# Altium PCB Eurocard VME 3U (3.937 x 8.660 inches).PCBDOC (part 1 of 2)
Units mm, origin at the board's own origin, x right, y up, seen from the top; angles counter-clockwise.
Board outline 219.96 x 100 mm, 2 copper layers (Component Side, Bottom Layer), stack 0.325 mm thick; 72 components, 87 nets, 462 pads, 228 vias.
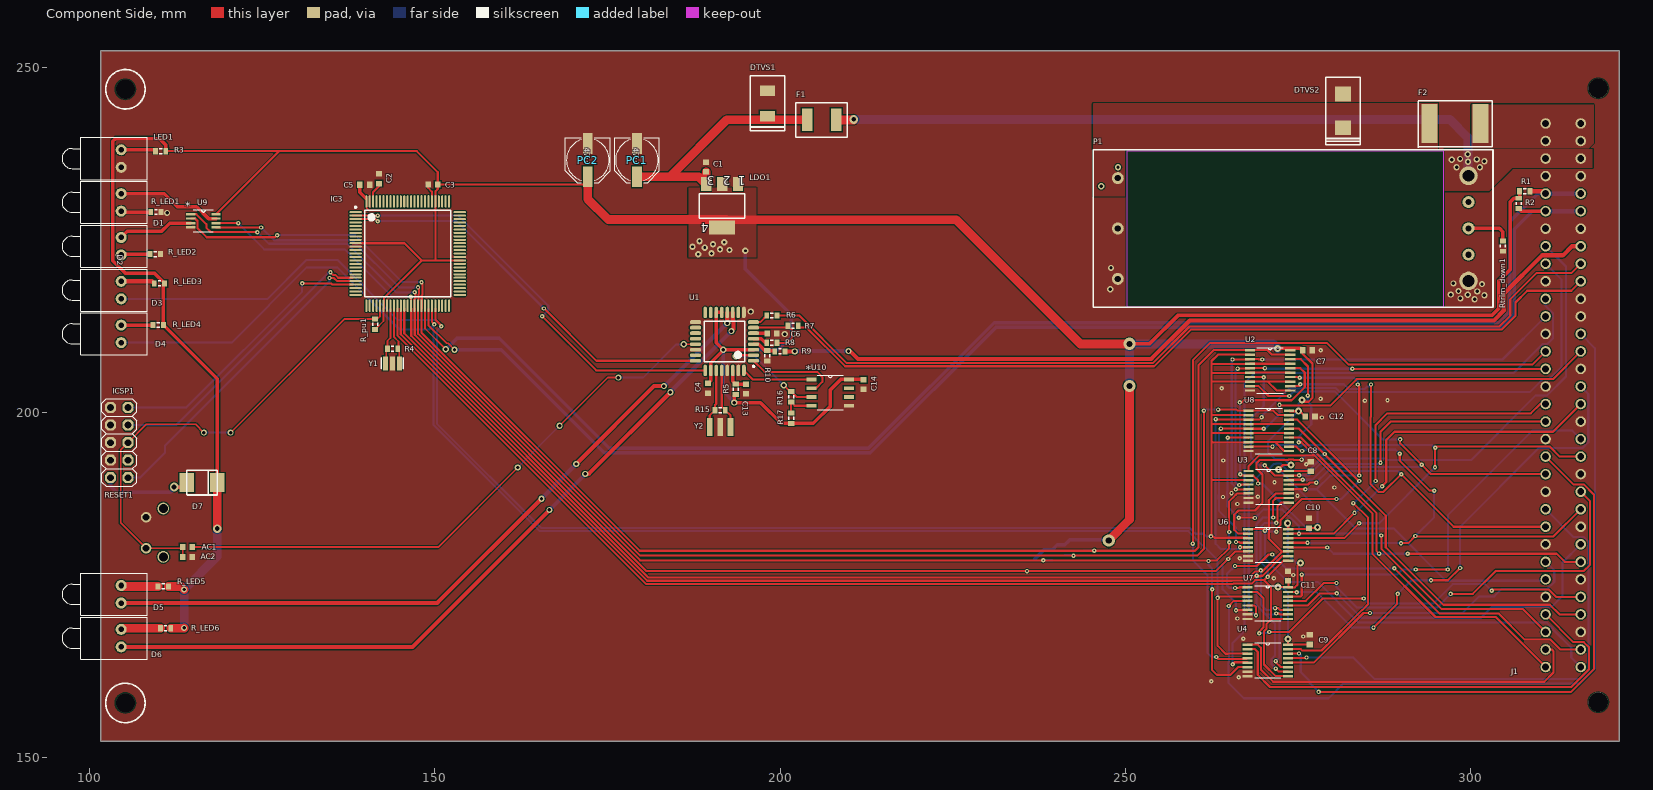
[diagram p0: Component Side view]
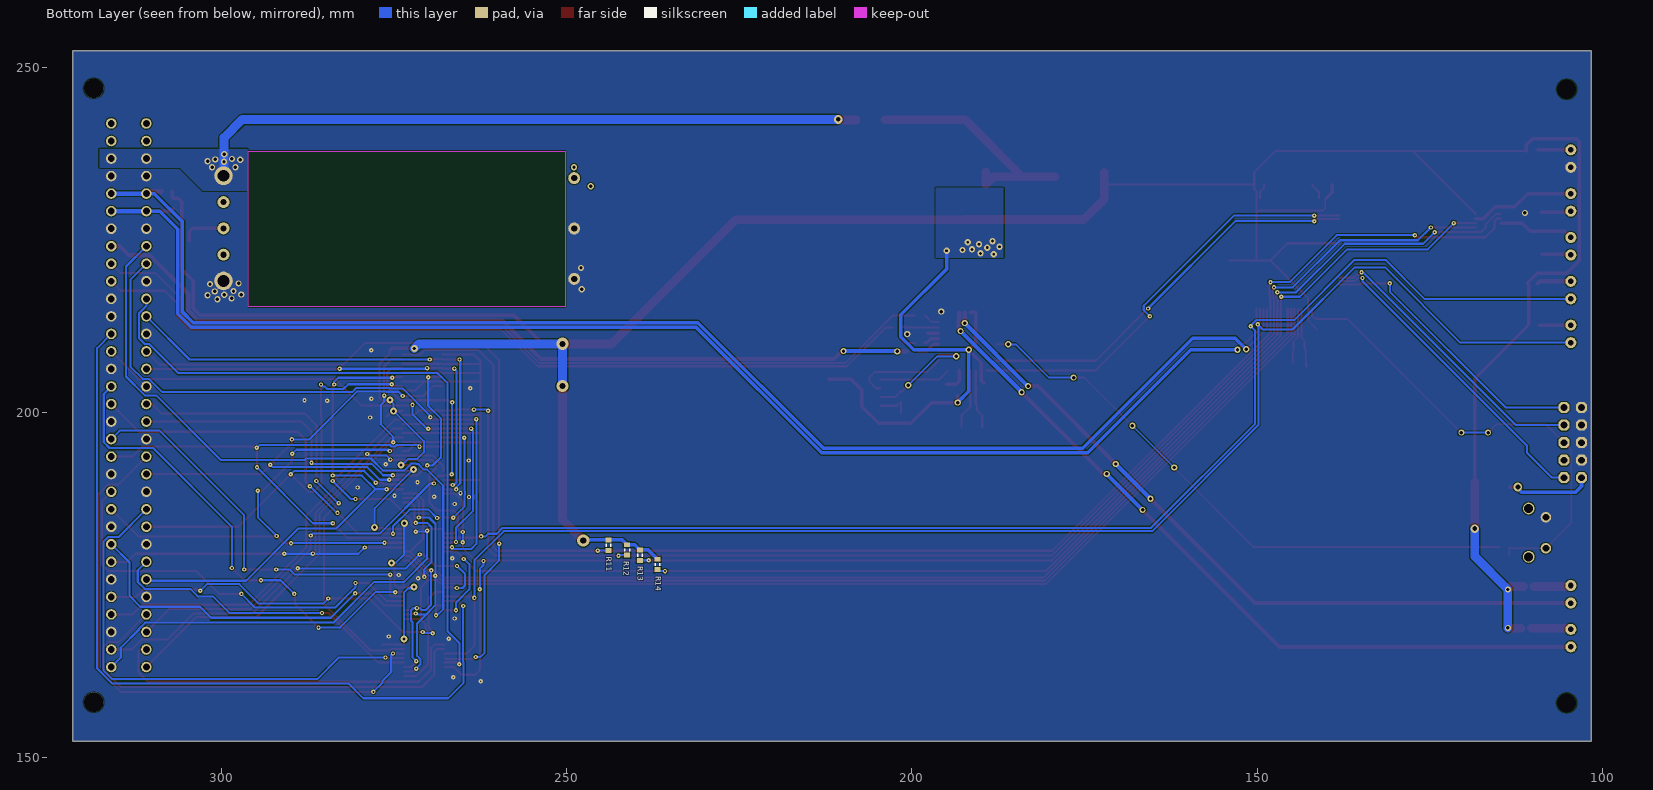
[diagram p1: Bottom Layer view, seen from below]

## Layer stack, top to bottom
Top Solder: solder mask 0.0102, Solder Resist, Dk 3.5
Component Side: signal copper 0.0356
Dielectric 1: core 0.254, FR-4, Dk 4.2
Bottom Layer: signal copper 0.0356
Solder Side: solder mask 0.0102, Solder Resist, Dk 3.5

## Board outline
101.6,152.4 321.564,152.4 321.564,252.4 101.6,252.4

## Design rules (kind name [scope] priority, off if disabled: settings)
Clearance [All] p1: gap=0.15 ignorepadtopadclearanceinfootprint=FALSE except(0: Arc-Hole Track-Hole SMDPad-Hole THPad-Hole Via-Hole Fill-Hole Poly-Hole Region-Hole Text-Hole)
FabricationTestPointUsage TestPointUsage [All] p1: valid=0 allowmultiple=FALSE
FabricationTestpoint Testpoint [All] p1: side=3 testpointundercomponent=TRUE minsize=1.016 maxsize=2.54 preferedsize=1.524 minholesize=0.508 maxholesize=1.016 preferedholesize=0.813 testpointgrid=0.025 allowsidetop=TRUE allowsidebottom=TRUE usegrid=TRUE gridtolerance=0
PlaneClearance [All] p1: clearance=0.254
PlaneConnect [All] p1: planeconnectstyle=Direct reliefexpansion=0.508 reliefentries=4 reliefconductorwidth=0.254 reliefairgap=0.254
PolygonConnect [All] p1: connectstyle=Direct reliefconductorwidth=0.254 reliefentries=4 polygonreliefangle="90 Angle" airgapwidth=0.254
RoutingVias [All] p1: holewidth=0.711 width=1.27 viastyle="Through Hole" minholewidth=0.711 minwidth=1.27 maxholewidth=0.711 maxwidth=1.27
SilkToSolderMaskClearance SilkscreenOverComponentPads [IsPad] p1: minsilkscreentomaskgap=0.254 clearancetoexposedcopper=TRUE
SolderMaskExpansion [All] p1: expansion=0.051
Width [All] p1: maxlimit=1.3 minlimit=0.1 preferedwidth=0.254
25 further rules are at their usual default settings.

## Components (designator, comment, footprint, x,y, rotation, side; value= is the part's Value field where it differs from the comment)
AC1 "Cap Semi" 1608[0603] 114.148,180.492 r0 top
AC2 "Cap Semi" 1608[0603] 114.148,179.07 r0 top
C1 "Cap Semi" 1608[0603] 189.281,235.56 r270 top
C2 "Cap Semi" 1608[0603] 141.884,233.858 r270 top
C3 "Cap Semi" 1608[0603] 149.708,233.02 r0 top
C4 "Cap Semi" 1608[0603] 189.56,203.505 r90 top
C5 "Cap Semi" 1608[0603] 139.827,232.969 r180 top
C6 "Cap Semi" 1608[0603] 198.806,211.43 r0 top
C7 "" 1608[0603] 276.377,209.017 r0 top
C8 "" 1608[0603] 276.86,192.176 r90 top
C9 "" 1608[0603] 276.708,167.081 r90 top
C10 "" 1608[0603] 276.606,183.947 r90 top
C11 "" 1608[0603] 273.583,176.301 r90 top
C12 "" 1608[0603] 276.784,199.415 r0 top
C13 "Cap Semi" 1608[0603] 195.047,203.378 r270 top
C14 "Cap Semi" 1608[0603] 212.09,204.038 r270 top
D1 "LEDYELLOW" LEDYELLOW 104.546,230.429 r180 top
D2 "LEDYELLOW" LEDYELLOW 104.546,224.079 r180 top
D3 "LEDYELLOW" LEDYELLOW 104.546,217.729 r180 top
D4 "LEDYELLOW" LEDYELLOW 104.546,211.379 r180 top
D5 "LEDYELLOW" LEDYELLOW 104.546,173.66 r180 top
D6 "LEDYELLOW" LEDYELLOW 104.546,167.31 r180 top
D7 "MBRS130LT3G" SMB-403A 116.256,189.84 r180 top
DTVS1 "SMBJ10CA" DO-214AA 198.171,244.78 r90 top
DTVS2 "SMBJ48A" SMBJ 281.534,243.688 r90 top
F1 "MINISMDC050F-2" MF-MSMF1 206.019,242.392 r180 top
F2 "" MC33192 297.764,241.859 r0 top
IC3 "ATMEGA2560-16AU" 100A_N 146.05,223.012 r0 top
ICSP1 "5x2 M" 2X05 104.267,195.631 r90 top
J1 "DIN41612_64WAY" "09 03 164 6919" 313.436,202.489 r270 top
LDO1 "LDO_5V" SOT223 191.592,229.921 r180 top
LED1 "LEDRED" LEDRED 104.546,236.779 r180 top
P1 "DCDCPowerModule" EHHD006A0B41-HZ 274.32,226.644 r0 top
PC1 "47u" PANASONIC_D 179.262,236.556 r270 top
PC2 "47u" PANASONIC_D 172.15,236.556 r270 top
R1 "" J1-0603 307.873,232.054 r0 top
R2 "" J1-0603 306.984,230.276 r270 top
R3 "" J1-0603 110.261,237.846 r180 top
R4 "" J1-0603 143.866,209.22 r180 top
R5 "" J1-0603 193.573,203.352 r270 top
R6 "" J1-0603 198.806,214.046 r0 top
R7 "" J1-0603 201.879,212.547 r0 top
R8 "" J1-0603 198.806,210.083 r0 top
R9 "" J1-0603 199.974,208.839 r180 top
R10 "" J1-0603 198.12,208.204 r270 top
R11 "" J1-0603 243.942,180.772 r270 bottom
R12 "" J1-0603 241.249,180.086 r270 bottom
R13 "" J1-0603 239.395,179.324 r270 bottom
R14 "" J1-0603 236.855,177.978 r270 bottom
R15 "" J1-0603 191.313,200.33 r180 top
R16 "" J1-0603 201.625,202.26 r90 top
R17 "" J1-0603 201.6,199.161 r90 top
R_LED1 "Res3" J1-0603 109.576,229.032 r0 top
R_LED2 "Res3" J1-0603 109.474,222.936 r0 top
R_LED3 "Res3" J1-0603 110.084,218.694 r0 top
R_LED4 "Res3" J1-0603 109.906,212.674 r0 top
R_LED5 "Res3" J1-0603 110.642,174.803 r0 top
R_LED6 "Res3" J1-0603 110.973,168.732 r0 top
R_pu1 "pullup" J1-0603 141.326,212.776 r270 top
RESET1 "PB_RST" 1-1825027-4 109.398,182.575 r270 top
Rtrim_down1 "" J1-0603 304.698,224.104 r90 top
U1 "FT232BL" LQFP-32_N 191.948,210.287 r180 top
U2 "OCTAL BUFFER/DRIVER" SOP65P640X120-20N 270.967,206.096 r0 top
U3 "single 8-Channel multiplexer" SOP65P640X120-16N 270.764,189.23 r0 top
U4 "single 8-Channel multiplexer" SOP65P640X120-16N 270.637,164.084 r0 top
U6 "single 8-Channel multiplexer" SOP65P640X120-16N 270.688,180.823 r0 top
U7 "single 8-Channel multiplexer" SOP65P640X120-16N 270.637,172.364 r0 top
U8 "OCTAL BUFFER/DRIVER" SOP65P640X120-20N 270.789,197.333 r0 top
U9 "SN74LVC2G00DCTR" SOP8 116.459,227.762 r0 top
U10 "1K Microwire Compatible Serial EEPROM" SOIC127P600X175-8N 207.264,202.87 r0 top
Y1 "CSTCE16M0V53-R0 16MHZ" RESONATOR 143.821,207.098 r0 top
Y2 "" CSTCR6M00G53-R0 191.313,197.891 r0 top

## Footprints (in the part's own frame and the unit in brackets; to place one, negate y for a bottom-side part, rotate by r counter-clockwise, add the part's x,y. Pads: shape width x height; smd on the part's side, far side on the other; paste and mask are expansions set on the pad)
1-1825027-4 [mm]
  round 1.7 hole 1.3: 0(-3.505,1.245) 0(3.505,1.245)
  round 1.524 hole 0.99: 1(-2.25,-1.245) 2(2.25,-1.245)
  body extent -4.2,-7.37 4.2,2.78, height 7
2X05 [mil]
  oct 62x62 hole 38: 1(-200,-50) 2(-200,50) 3(-100,-50) 4(-100,50) 5(0,-50) 6(0,50) 7(100,-50) 8(100,50) 9(200,-50) 10(200,50)
  silkscreen extent -250,-100 250,100
"09 03 164 6919" [mil]
  round 110.24 hole 110.24: 0(-1750,200) 0(1750,200)
  round 60 hole 39.37: 0(-1550,100) 1(-1450,100) 2(-1350,100) 3(-1250,100) 4(-1150,100) 5(-1050,100) 6(-950,100) 7(-850,100) 8(-750,100) 9(-650,100) 10(-550,100) 11(-450,100) 12(-350,100) 13(-250,100) 14(-150,100) 15(-50,100) 16(50,100) 17(150,100) 18(250,100) 19(350,100) 20(450,100) 21(550,100) 22(650,100) 23(750,100) 24(850,100) 25(950,100) 26(1050,100) 27(1150,100) 28(1250,100) 29(1350,100) 30(1450,100) 31(1550,100) 32(-1550,-100) 33(-1450,-100) 34(-1350,-100) 35(-1250,-100) 36(-1150,-100) 37(-1050,-100) 38(-950,-100) 39(-850,-100) 40(-750,-100) 41(-650,-100) 42(-550,-100) 43(-450,-100) 44(-350,-100) 45(-250,-100) 46(-150,-100) 47(-50,-100) 48(50,-100) 49(150,-100) 50(250,-100) 51(350,-100) 52(450,-100) 53(550,-100) 54(650,-100) 55(750,-100) 56(850,-100) 57(950,-100) 58(1050,-100) 59(1150,-100) 60(1250,-100) 61(1350,-100) 62(1450,-100) 63(1550,-100)
  body extent -1850,-100 1851,609, height 368
100A_N [mm] "Thin QFP, 100-Leads, Body 14x14mm, Pitch 0.5mm, IPC Medium Density"
  oval 1.8x0.291 smd mask+0.08: 1(-7.55,6) 2(-7.55,5.5) 3(-7.55,5) 4(-7.55,4.5) 5(-7.55,4) 6(-7.55,3.5) 7(-7.55,3) 8(-7.55,2.5) 9(-7.55,2) 10(-7.55,1.5) 11(-7.55,1) 12(-7.55,0.5) 13(-7.55,0) 14(-7.55,-0.5) 15(-7.55,-1) 16(-7.55,-1.5) 17(-7.55,-2) 18(-7.55,-2.5) 19(-7.55,-3) 20(-7.55,-3.5) 21(-7.55,-4) 22(-7.55,-4.5) 23(-7.55,-5) 24(-7.55,-5.5) 25(-7.55,-6) 51(7.55,-6) 52(7.55,-5.5) 53(7.55,-5) 54(7.55,-4.5) 55(7.55,-4) 56(7.55,-3.5) 57(7.55,-3) 58(7.55,-2.5) 59(7.55,-2) 60(7.55,-1.5) 61(7.55,-1) 62(7.55,-0.5) 63(7.55,0) 64(7.55,0.5) 65(7.55,1) 66(7.55,1.5) 67(7.55,2) 68(7.55,2.5) 69(7.55,3) 70(7.55,3.5) 71(7.55,4) 72(7.55,4.5) 73(7.55,5) 74(7.55,5.5) 75(7.55,6)
  oval 0.291x1.8 smd mask+0.08: 26(-6,-7.55) 27(-5.5,-7.55) 28(-5,-7.55) 29(-4.5,-7.55) 30(-4,-7.55) 31(-3.5,-7.55) 32(-3,-7.55) 33(-2.5,-7.55) 34(-2,-7.55) 35(-1.5,-7.55) 36(-1,-7.55) 37(-0.5,-7.55) 38(0,-7.55) 39(0.5,-7.55) 40(1,-7.55) 41(1.5,-7.55) 42(2,-7.55) 43(2.5,-7.55) 44(3,-7.55) 45(3.5,-7.55) 46(4,-7.55) 47(4.5,-7.55) 48(5,-7.55) 49(5.5,-7.55) 50(6,-7.55) 76(6,7.55) 77(5.5,7.55) 78(5,7.55) 79(4.5,7.55) 80(4,7.55) 81(3.5,7.55) 82(3,7.55) 83(2.5,7.55) 84(2,7.55) 85(1.5,7.55) 86(1,7.55) 87(0.5,7.55) 88(0,7.55) 89(-0.5,7.55) 90(-1,7.55) 91(-1.5,7.55) 92(-2,7.55) 93(-2.5,7.55) 94(-3,7.55) 95(-3.5,7.55) 96(-4,7.55) 97(-4.5,7.55) 98(-5,7.55) 99(-5.5,7.55) 100(-6,7.55)
  silkscreen extent -7.67,-6.25 6.25,6.82, body extent -7,-7 7,7, height 1.2
1608[0603] [mm] "Chip Capacitor, Body 1.6x0.8mm, IPC High Density"
  rect 0.8x0.9 smd: 1(-0.7,0) 2(0.7,0)
  body extent -0.87,-0.48 0.87,0.48, height 1.3
CSTCR6M00G53-R0 [mm]
  rect 0.8x2.6 smd: 1(-1.5,0) 2(0,0) 3(1.5,0)
DO-214AA [mm]
  rect 1.52x2.18 smd: 1(-1.84,0) 2(1.84,0)
  silkscreen extent -4.01,-2.5 4.01,2.5, body extent -2.1,-1.7 2.15,1.7, height 2
EHHD006A0B41-HZ [mm]
  round 1.724 hole 0.9: 1(-25.4,7.3) 2(-25.4,0) 3(-25.4,-7.3) 5(25.4,-3.79) 6(25.4,0.02) 7(25.4,3.83)
  round 2.7 hole 1.7: 4(25.4,-7.6) 8(25.4,7.64)
  KeepOutLayer region: -24.1,-11.3 21.8,-11.3 21.8,11.2 -24.1,11.2
  silkscreen extent -28.95,-11.4 28.95,11.4, body extent -28.8,-11.5 28.9,11.3, height 9
J1-0603 [mm] "Chip Resistor, Body 1.6x0.8mm, IPC High Density"
  rect 0.7x0.9 smd: 1(-0.75,0) 2(0.75,0)
  silkscreen extent -0.2,-0.35 0.2,0.35, body extent -0.85,-0.48 0.85,0.48, height 0.9
LEDRED [mm] "LED; 2 Leads"
  round 1.6 hole 0.8: 1(0,1.27) 2(0,-1.27)
  silkscreen extent -3.81,-3.05 8.56,3.05, body extent -3.76,-3.05 8.64,2.92, height 5.97
LEDYELLOW [mm] "LED; 2 Leads"
  round 1.6 hole 0.8: 1(0,1.27) 2(0,-1.27)
  silkscreen extent -3.81,-3.05 8.56,3.05, body extent -3.76,-3.05 8.64,2.92, height 5.97
LQFP-32_N [mm] "Thin QFP, 32-Leads, Body 7x7mm, Pitch 0.8mm, IPC Medium Density"
  oval 1.65x0.55 smd: 1(-4.2,2.8) 2(-4.2,2) 3(-4.2,1.2) 4(-4.2,0.4) 5(-4.2,-0.4) 6(-4.2,-1.2) 7(-4.2,-2) 8(-4.2,-2.8) 17(4.2,-2.8) 18(4.2,-2) 19(4.2,-1.2) 20(4.2,-0.4) 21(4.2,0.4) 22(4.2,1.2) 23(4.2,2) 24(4.2,2.8)
  oval 0.55x1.65 smd: 9(-2.8,-4.2) 10(-2,-4.2) 11(-1.2,-4.2) 12(-0.4,-4.2) 13(0.4,-4.2) 14(1.2,-4.2) 15(2,-4.2) 16(2.8,-4.2) 25(2.8,4.2) 26(2,4.2) 27(1.2,4.2) 28(0.4,4.2) 29(-0.4,4.2) 30(-1.2,4.2) 31(-2,4.2) 32(-2.8,4.2)
  silkscreen extent -4.33,-2.95 2.95,3.75, body extent -3.5,-3.5 3.5,3.5, height 1.2
MC33192 [mm]
  rect 2.3x5.6 smd: 1(-3.7,0) 2(3.7,0)
  silkscreen extent -5.35,-3.5 5.4,3.3, body extent -4.4,-2.8 4.4,2.8, height 0.5
MF-MSMF1 [mm]
  rect 1.55x3.3 smd: 1(-2.1,0) 2(2.1,0)
  silkscreen extent -3.72,-2.5 3.73,2.5, body extent -2.5,-1.6 2.5,1.6, height 0.5
PANASONIC_D [mm] "PANASONIC_D"
  rect 3x1.4 smd: +(2.4,0) -(-2.4,0)
  silkscreen extent -3.25,-3.25 3.25,3.25
RESONATOR [mil]
  rect 28x79 smd: 1(-39.37,0) 2(0,0) 3(40,0)
  silkscreen extent -63,-31 63,32
SMB-403A [mm]
  rect 2.159x2.743 smd: 1(-2.21,0) 2(2.21,0)
  silkscreen extent -2.2,-1.8 2.2,1.8, body extent -2.1,-1.9 2.3,1.7, height 2
SMBJ [mm]
  rect 2.16x2.26 smd: 1(-2.45,0) 2(2.45,0)
  silkscreen extent -4.9,-2.5 4.9,2.5, body extent -3.2,-2 3.3,2, height 2
SOIC127P600X175-8N [mil]
  rect 58x22 smd: 1(-107,75) 2(-107,25) 3(-107,-25) 4(-107,-75) 5(107,-75) 6(107,-25) 7(107,25) 8(107,75)
  silkscreen extent -74,-98 74,98
SOP8 [mil]
  rect 52x14 smd: 1(-72,38) 2(-72,13) 3(-72,-13) 4(-72,-38) 5(72,-38) 6(72,-13) 7(72,13) 8(72,38)
  silkscreen extent -57,-62 57,62
SOP65P640X120-16N [mil]
  rect 58x14 smd: 1(-115,90) 2(-115,64) 3(-115,38) 4(-115,13) 5(-115,-13) 6(-115,-38) 7(-115,-64) 8(-115,-90) 9(115,-90) 10(115,-64) 11(115,-38) 12(115,-13) 13(115,13) 14(115,38) 15(115,64) 16(115,90)
  silkscreen extent -74,-100 74,100, body extent -94,-102 91,98, height 20
SOP65P640X120-20N [mil]
  rect 58x14 smd: 1(-115,115) 2(-115,90) 3(-115,64) 4(-115,38) 5(-115,13) 6(-115,-13) 7(-115,-38) 8(-115,-64) 9(-115,-90) 10(-115,-115) 11(115,-115) 12(115,-90) 13(115,-64) 14(115,-38) 15(115,-13) 16(115,13) 17(115,38) 18(115,64) 19(115,90) 20(115,115)
  silkscreen extent -76,-130 76,130, body extent -94,-130 94,130, height 20
SOT223 [mm]
  rect 1.5x2 smd: 1(-2.3,-3.15) 2(0,-3.15) 3(2.3,-3.15)
  rect 3.8x2 smd: 4(0,3.15)
  silkscreen extent -3.28,-1.78 3.28,1.78, body extent -3.3,-4.2 3.3,4.2, height 1

## Part data
AC1 AC2 C1 C2 C3 C4 C5 C6 C13 C14: "Capacitor (Semiconductor SIM Model)"
C7 C8 C9 C10 C11 C12: library part "Cap Semi", "Capacitor (Semiconductor SIM Model)"
D7: "Power Diode"
DTVS1 DTVS2: library part SMBJ, "TVS"
F1 F2: library part "Fuse 1", "Fuse"
IC3: library part ATMEGA2560AU, "MICROCONTROLLER   64/128/256 Kbytes FLASH   4 Kbytes EEPROM   8 Kbytes SRAM   86 General Purpose I/O pins   12-channels16-bit PWM   4 x Serial USARTs   16-channels 10-bit A/D"
ICSP1: library part PINHD-2X5
PC1 PC2: library part CPOL-EUD, "POLARIZED CAPACITOR, European symbol"
R1 R2 R3 R4 R5 R6 R7 R8 R9 R10 R11 R12 R13 R14 R15 R16 R17 R_pu1 Rtrim_down1: library part Res3, "Resistor"
R_LED1 R_LED2 R_LED3 R_LED4 R_LED5 R_LED6: "Resistor"
U1: "USB UART Asynchronous Serial Data Transfer Chip, 0 to +70 degC, 32-pin LQFP, Pb-Free"
U2 U8: library part SN74LVC244APWR
U3 U4 U6 U7: library part CD4051BPW
U10: library part 93LC46B-I/SN
Y1 Y2: library part RESONATORMU

## Free pads (board coordinates)
  round 1.27 hole 2.794: 1(105.156,246.812) 2(105.156,157.912)

## Via types
v1: diameter 0.635, hole 0.254, Component Side to Bottom Layer, 154 vias
v2: diameter 0.9, hole 0.5, Component Side to Bottom Layer, 48 vias
v3: diameter 1.016, hole 0.457, Component Side to Bottom Layer, 10 vias
v4: diameter 0.914/0.914 (per signal layer), hole 0.406, Component Side to Bottom Layer, 10 vias
v5: diameter 1.778, hole 0.9, Component Side to Bottom Layer, 3 vias
v6: diameter 1.27, hole 0.711, Component Side to Bottom Layer, 2 vias
v7: diameter 1.27, hole 0.635, Component Side to Bottom Layer, 1 vias

## Nets (pads, with @x,y where several pads share a name; then routed paths per layer and width w, separated by ;. In a path a pad name is that pad's centre, name@x,y a point inside that pad or via, vN(x,y) a via of type N, cw(c..) or ccw(c..) an arc to the next point about the centre after c; other vN are vias at no path point)
9V: F1.1 J1.2 J1.34 P1.8 | length 98.1
  Component Side w1.3: F1.1@208.119,242.392 v7@210.617,242.392
  Bottom Layer w1.3: v7(210.668,242.443) 297.002,242.443 299.644,239.801 P1.8@299.644,234.284
  other v2: 297.993,235.509 301.371,235.509 299.644,236.322 302.031,236.398 297.282,236.601 300.914,236.652 298.501,236.728 299.618,237.414
36V: F2.2 J1.0@315.976,241.859 J1.1 J1.32 J1.33
+5V: C3.2 C4.2 C5.2 C7.1 C8.1 C9.1 C10.1 C11.1 C12.1 C14.1 D7.1 IC3.10 IC3.31 IC3.61 IC3.80 IC3.100 LDO1.2 LDO1.4 PC2.+ R1.1 R2.1 R3.1 R5.2 R11.1 R12.1 R13.1 R14.1 R17.1 R_LED3.2 R_LED4.2 R_LED5.2 R_LED6.2 R_pu1.2 U1.3 U1.13 U1.14 U1.26 U2.20 U3.16 U4.16 U6.16 U7.16 U8.20 U9.8 U10.8 | length 609.1
  Component Side w0.254: IC3.100@140.05,231.012 140.123,230.939 140.123,229.586 140.448,229.26 150.05,229.26 ; R_pu1.2@141.326,212.026 142.55,213.25 IC3.31@142.55,215.012
  Component Side w0.305: R3.1@111.011,237.846 127.406,237.846 ; U9.8@118.288,228.727 127.406,237.846 ; IC3.10@138.05,224.512 145.591,224.512 148.093,222.011 ; IC3.31@142.55,215.012 142.598,215.06 142.598,216.516 148.094,222.012 IC3.61@154.05,222.012 ; 150.05,222.012 150.05,229.26 150.05,231.012 150.098,231.06 150.098,232.064 150.408,232.374 C3.2@150.408,233.02 ; PC2.+@171.565,233.02 C3.2@150.408,233.02 ; v3(272.136,174.727) 273.634,174.727 C11.1@273.634,175.906 ; v3(273.558,167.157) U4.16@273.558,166.37 C9.1@276.696,166.37 ; U7.16@273.558,174.65 274.549,174.65 274.955,175.057 274.955,176.238 274.945,176.248 274.945,177.764 v3(275.387,178.206) ; v3@273.609,183.718 U6.16@273.609,183.109 C10.1@276.468,183.109 ; U8.20@273.812,200.254 273.888,200.177 v3(275.107,200.177) 275.169,200.177 275.246,200.254 C12.1@276.084,199.415 ; v3(274.015,192.38) 272.847,192.38 v3(272.212,191.745) 272.44,191.516 U3.16@273.685,191.516 273.685,191.526 C8.1@276.81,191.526 ; C7.1@275.423,209.017 C7.1@275.677,209.017 275.677,208.523 277.114,207.086 277.114,202.105 276.555,201.547 275.846,201.547 v3(275.59,201.803) ; C10.1@276.606,183.247 v3@277.709,183.247 ; 127.406,237.846 147.371,237.846 150.408,234.809 C3.2@150.408,233.02
  Component Side w0.508: R3.1@111.011,237.846 111.011,238.747 110.084,239.674 103.759,239.674 103.342,239.258 103.342,221.981 105.131,220.193 109.335,220.193 R_LED3.2@110.834,218.694 110.656,218.516 R_LED4.2@110.656,212.674 118.466,204.864 D7.1@118.466,189.84 ; C5.2@139.127,232.969 139.127,231.881 IC3.100@139.996,231.012 ; C4.2@189.56,204.205 189.948,204.592 U1.26@189.948,206.087 189.948,207.22 191.815,209.087 U1.3@196.148,209.087 ; U1.13@191.548,214.487 U1.14@190.748,214.487 190.748,210.115 v2(191.776,209.087) ; R5.2@193.37,202.399 v2(193.37,201.422) 197.155,201.422 200.165,198.411 R17.1@201.6,198.411 204.787,198.411 207.289,200.914 207.289,203.302 208.763,204.775 U10.8@209.982,204.775 C14.1@212.053,204.775 ; v5(250.596,209.931) 253.517,209.931 257.63,214.043 303.109,214.043 304.117,215.051 304.117,219.052 305.74,220.675 305.74,230.454 306.312,231.026 R2.1@306.984,231.026 307.123,231.165 R1.1@307.123,232.054 ; v3(272.085,209.271) C7.1@275.423,209.271
  Component Side w1.27: R_LED5.2@111.392,174.803 113.208,174.803 v2(113.665,174.346) ; R_LED6.2@111.723,168.732 113.614,168.732 v2(113.665,168.783) ; v6(118.466,183.16) D7.1@118.466,189.84 ; PC2.+@172.15,234.778 PC2.+@172.15,234.156 172.15,230.898 175.109,227.938 192.19,227.938 ; 192.191,227.92 225.495,227.92 243.484,209.931 v5(250.596,209.931) ; v5@247.523,181.381 250.622,184.48 v5(250.622,203.835)
  Bottom Layer w0.305: v3(272.136,174.727) 272.339,174.523 272.974,174.523 273.558,173.939 v3(273.558,167.157) ; v3(272.212,191.745) 277.825,186.131 v3(277.825,183.363) ; v3(273.533,183.947) 273.533,179.426 274.752,178.206 v3(275.387,178.206) ; v3@273.812,192.405 272.948,193.269 271.653,193.269 270.703,194.219 270.703,195.849 275.031,200.177 v3(275.107,200.177) 275.107,201.32 v3(275.59,201.803)
  Bottom Layer w0.508: v2@193.383,201.435 191.776,203.041 v2(191.776,209.087) 199.739,209.087 201.6,210.947 201.6,214.147 194.97,220.777 v4(194.97,223.418) ; R14.1@236.855,178.728 238.201,180.074 R13.1@239.395,180.074 240.157,180.836 R12.1@241.249,180.836 241.935,181.522 R11.1@243.942,181.522 247.51,181.522 v5(247.599,181.432) v5@247.472,181.432
  Bottom Layer w1.27: v2(113.665,168.783) v2(113.665,174.346) 118.466,179.146 v6(118.466,183.16) ; v5@250.596,203.835 v5(250.596,209.931) 271.424,209.931 v3(272.085,209.271)
  other v4: 188.138,222.91 190.068,223.037 192.659,223.52 191.287,223.622 189.078,223.876 187.3,224.003 190.271,224.358 191.897,224.663 188.316,224.815
AREF: C2.2 IC3.98 | length 2.4
  Component Side w0.305: IC3.98@141.05,231.012 141.05,231.931 141.986,232.867 C2.2@141.986,233.005
BRD_CST_EN_A: IC3.42 R11.2 U2.1 U2.19 U9.2 | length 213.7
  Component Side w0.305: U9.2@114.63,228.092 115.236,228.092 115.593,227.735 115.593,226.697 116.916,225.374 126.822,225.374 v1(127.127,225.679) ; v1(148.05,218.872) 148.17,218.752 148.17,216.999 148.08,216.908 148.08,215.042 148.05,215.012 148.05,211.563 179.654,179.959 260.096,179.959 260.604,180.467 260.604,206.832 262.788,209.017 U2.1@268.046,209.017 270.612,209.017 271.247,208.382 U2.19@273.888,208.382
  Bottom Layer w0.305: v1(127.127,225.679) 138.455,225.679 145.263,218.872 v1(148.05,218.872) ; R11.2@243.942,180.022 v1@245.479,180.022
  other v1: 245.516,179.984
BRD_CST_EN_B: IC3.41 R12.2 U8.1 U8.19 U9.5 | length 201.1
  Component Side w0.305: U9.5@118.288,226.797 v1(124.816,226.797) ; v1(147.55,218.11) 147.67,217.99 147.67,217.142 147.625,217.097 147.625,216.425 147.602,216.402 147.602,216.296 147.55,216.244 147.55,211.385 147.585,211.385 179.722,179.248 v1(242.494,179.248) 260.426,179.248 261.391,180.213 v1(261.391,200.228) ; v1(263.449,200.406) 266.116,200.406 266.268,200.254 U8.1@267.868,200.254 271.45,200.254 272.085,199.619 U8.19@273.71,199.619
  Bottom Layer w0.305: v1@124.841,226.797 126.695,224.942 137.973,224.942 144.805,218.11 v1(147.55,218.11) ; R12.2@241.249,179.336 v1@242.406,179.336 ; v1(261.391,200.228) 261.569,200.406 v1(263.449,200.406)
D+: J1.9 R7.2 | length 121.7
  Component Side w0.305: R7.2@202.768,212.287 203.816,212.287 209.416,206.687 254.188,206.687 259.492,211.991 304.498,211.991 306.527,214.02 306.527,215.925 308.229,217.627 314.604,217.627 J1.9@315.976,218.999
D-: J1.8 R6.2 | length 126.6
  Component Side w0.305: R6.2@199.556,214.046 202.768,214.046 209.672,207.142 254,207.142 259.304,212.446 304.19,212.446 305.765,214.02 305.765,216.383 309.601,220.218 314.655,220.218 J1.8@315.976,221.539
DTR: AC1.2 U1.21 | length 85.1
  Component Side w0.254: AC1.2@114.848,180.492 150.47,180.492 v2(162.001,192.024) ; v2(168.046,198.069) 175.031,205.054 v2(176.581,205.054) ; v2(186.036,209.887) U1.21@187.748,209.887
  Bottom Layer w0.254: v2(162.001,192.024) v2(168.046,198.069) ; v2(176.581,205.054) 180.162,205.054 184.963,209.855 v2@186.055,209.855
GND: AC2.2 C1.1 C2.1 C3.1 C4.1 C5.1 C6.2 C7.2 C8.2 C9.2 C10.2 C11.2 C12.2 C13.2 C14.2 DTVS1.2 DTVS2.2 IC3.11 IC3.32 IC3.62 IC3.81 IC3.99 ICSP1.4 ICSP1.6 ICSP1.8 ICSP1.10 J1.3 J1.6 J1.10 J1.11 J1.14 J1.17 J1.20 J1.23 J1.26 J1.29 J1.35 J1.38 J1.41 J1.44 J1.47 J1.50 J1.53 J1.56 J1.59 LDO1.1 LED1.1 P1.2 P1.3 P1.4 PC1.- PC2.- R10.2 R_LED1.2 R_LED2.2 RESET1.1 Rtrim_down1.1 U1.9 U1.17 U1.22 U1.29 U1.31 U2.10 U3.7 U3.8 U4.7 U4.8 U6.7 U6.8 U7.7 U7.8 U8.10 U9.4 U10.5 Y1.2 Y2.2 | length 2.2
  Component Side w0.305: C3.1@149.008,233.02 149.008,232.526 149.55,231.983 IC3.81@149.55,231.012
  other v1: 262.454,161.045 266.446,161.652 267.081,167.208 275.793,167.538 266.243,170.155 271.526,175.997 274.32,176.454 266.598,178.867 266.243,186.741 264.16,187.757 269.215,187.782 274.955,187.935 265.379,188.316 280.295,189.129 271.621,189.897 276.2,192.507 264.185,193.034 278.486,199.263 284.709,201.676 287.985,201.778 278.292,201.987 263.975,203.512 278.299,209.021
  other v2: 200.685,211.353 195.758,214.605 300.609,216.383 298.552,216.51 302.031,216.967 299.618,217.043 297.155,217.068 300.99,217.526 298.272,217.576 247.828,217.83 301.676,218.592 297.536,218.694 247.929,220.929 111.201,228.905
MUX_ADRS0: IC3.37 U3.11 U4.11 U6.11 U7.11 | length 179.3
  Component Side w0.305: IC3.37@145.55,215.012 145.55,211.456 180.928,176.078 265.253,176.078 265.279,176.104 267.937,176.104 268.78,176.947 269.294,176.947 ; v1@269.811,176.924 272.745,179.857 ; v1(271.704,171.653) 272.161,171.653 272.415,171.399 U7.11@273.558,171.399 ; v1(271.805,163.982) 271.805,163.83 272.517,163.119 U4.11@273.558,163.119 ; U6.11@273.609,179.857 272.745,179.857 ; U3.11@273.685,188.265 271.78,188.265 270.789,187.274 270.789,183.35 270.85,183.289 270.85,182.598 270.789,182.537 270.789,181.737 272.669,179.857 272.745,179.857
  Bottom Layer w0.305: v1(269.621,177.114) 269.657,177.079 269.657,172.126 270.408,171.374 271.018,171.374 271.297,171.653 v1(271.704,171.653) 272.263,171.653 272.567,171.348 272.567,169.85 272.364,169.647 272.364,164.541 v1(271.805,163.982)
MUX_ADRS1: IC3.36 U3.10 U4.10 U6.10 U7.10 | length 185.5
  Component Side w0.305: IC3.36@145.05,215.012 145.05,211.313 180.74,175.623 265.441,175.623 265.467,175.649 268.125,175.649 268.753,176.276 269.608,176.276 269.669,176.337 269.898,176.337 272.758,179.197 U6.10@273.609,179.197 ; v1(271.424,184.785) 271.424,187.198 271.831,187.604 U3.10@273.685,187.604 ; v1(271.805,162.89) 272.237,162.458 U4.10@273.558,162.458 ; v1(271.856,170.866) 272.288,170.866 272.44,170.713 273.533,170.713 U7.10@273.558,170.739
  Bottom Layer w0.305: v1(271.424,184.785) 269.951,184.785 269.001,183.835 269.001,176.362 v1(269.037,176.327) 269.037,172.06 ; 271.577,170.713 270.383,170.713 269.037,172.06 ; v1(271.805,162.89) 271.186,163.51 271.186,164.239 271.678,164.732 271.678,169.418 269.037,172.06
MUX_ADRS2: IC3.35 U3.9 U4.9 U6.9 U7.9 | length 183.4
  Component Side w0.305: IC3.35@144.55,215.012 144.55,211.17 180.552,175.168 265.63,175.168 265.656,175.194 268.314,175.194 268.827,175.707 270.093,175.707 ; v1(271.882,183.998) 272.044,184.16 272.044,186.395 272.593,186.944 U3.9@273.685,186.944 ; U4.9@273.558,161.798 271.78,161.798 270.101,163.477 270.101,168.311 270.482,168.692 270.482,169.365 271.196,170.078 ; U7.9@273.558,170.078 271.196,170.078 ; U6.9@273.609,178.537 272.923,178.537 270.093,175.707 ; 270.093,175.707 271.084,174.716 271.084,170.19 271.196,170.078
  Bottom Layer w0.305: v1(270.637,176.174) 270.637,177.267 269.611,178.293 269.611,183.401 270.207,183.998 v1(271.882,183.998)
MUX_EN_A: IC3.40 R13.2 U3.6 U4.6 U9.1 | length 209.9
  Component Side w0.305: U9.1@114.63,228.727 115.443,228.727 116.891,227.279 116.891,226.771 117.551,226.111 v1(124.282,226.111) ; IC3.40@147.05,215.012 147.05,216.297 147.005,216.342 147.147,216.484 147.147,216.59 147.17,216.613 147.17,217.279 v1(147.05,217.399) ; IC3.40@147.066,215.012 147.066,211.226 179.73,178.562 263.271,178.562 265.049,180.34 v1(265.049,181.178) 265.049,180.492 ; v1(262.585,174.371) 262.551,174.337 262.551,162.711 263.261,162.001 265.252,162.001 266.37,163.119 U4.6@267.716,163.119 ; v1(265.049,182.677) 265.049,187.122 265.623,187.696 265.636,187.696 265.999,188.059 265.999,188.072 266.156,188.229 267.807,188.229 U3.6@267.843,188.265
  Bottom Layer w0.305: v1@124.257,226.111 125.933,224.434 137.312,224.434 144.348,217.399 v1(147.05,217.399) ; v1(238.1,178.587) R13.2@239.382,178.587 ; v1(262.052,178.486) 262.052,177.902 262.585,177.368 v1(262.585,174.371) ; v1(265.049,181.178) v1(265.049,182.677)
MUX_EN_B: IC3.39 R14.2 U6.6 U7.6 U9.6 | length 186.4
  Component Side w0.305: U9.6@118.288,227.432 v1(121.514,227.432) ; v1(146.507,216.764) 146.507,215.055 IC3.39@146.55,215.012 ; IC3.39@146.558,215.012 146.558,211.091 180.637,177.013 v1(235.763,177.013) 263.119,177.013 265.953,179.847 267.757,179.847 U6.6@267.767,179.857 ; v1(266.04,171.348) 267.665,171.348 U7.6@267.716,171.399
  Bottom Layer w0.305: v1@121.488,227.406 125.273,223.622 136.931,223.622 143.789,216.764 v1(146.507,216.764) ; v1(235.763,177.013) R14.2@237.046,177.013 ; v1@264.897,178.791 264.109,178.003 264.109,174.371 266.04,172.441 v1(266.04,171.348)
  other v1: 264.922,178.765
NetC6_1: C6.1 U1.6 | length 1.6
  Component Side w0.508: U1.6@196.148,211.487 C6.1@197.795,211.487
NetC13_1: C13.1 R5.1 U1.30 | length 3.6
  Component Side w0.508: U1.30@193.148,206.087 193.148,204.528 R5.1@193.573,204.102 C13.1@195.022,204.102
NetD1_1: D1.1 R_LED1.1 | length 4.2
  Component Side w0.508: D1.1@104.673,229.032 R_LED1.1@108.826,229.032
NetD1_2: D1.2 U9.7 | length 15.2
  Component Side w0.508: D1.2@104.546,231.699 110.795,231.699 112.7,229.794 115.494,229.794 117.196,228.092 U9.7@118.288,228.092
NetD2_1: D2.1 R_LED2.1 | length 4.1
  Component Side w0.508: D2.1@104.673,222.936 R_LED2.1@108.724,222.936
NetD2_2: D2.2 U9.3 | length 10.9
  Component Side w0.508: D2.2@104.546,225.349 105.435,226.238 110.388,226.238 111.582,227.432 U9.3@114.63,227.432
NetD3_2: D3.2 R_LED3.1 | length 4.9
  Component Side w0.61: D3.2@104.546,218.999 109.029,218.999 R_LED3.1@109.334,218.694
NetD4_2: D4.2 R_LED4.1 | length 4.6
  Component Side w0.508: D4.2@104.546,212.649 R_LED4.1@109.13,212.649
NetD5_2: D5.2 R_LED5.1 | length 5.2
  Component Side w1.27: D5.2@104.673,174.803 R_LED5.1@109.892,174.803
NetD6_2: D6.2 R_LED6.1 | length 5.5
  Component Side w1.27: D6.2@104.699,168.732 R_LED6.1@110.223,168.732
NetD7_2: D7.2 ICSP1.2 | length 11.9
  Component Side w0.508: v6(112.217,189.179) D7.2@113.385,189.179
  Bottom Layer w0.508: ICSP1.2@102.997,190.551 102.997,189.306 103.835,188.468 111.709,188.468 v6@112.027,188.785
NetDTVS2_1: DTVS2.1 F2.1 P1.1
NetLED1_2: LED1.2 R3.2 | length 4.8
  Component Side w0.508: LED1.2@104.546,238.049 R3.2@109.308,238.049
NetP1_6: P1.6 Rtrim_down1.2 | length 6.6
  Component Side w0.508: P1.6@299.644,226.664 304.208,226.664 304.698,226.174 Rtrim_down1.2@304.698,224.854
NetR6_1: R6.1 U1.8 | length 2.3
  Component Side w0.305: U1.8@196.148,213.087 197.097,213.087 R6.1@198.056,214.046
NetR7_1: R7.1 R8.2 U1.7 | length 9.5
  Component Side w0.305: U1.7@196.148,212.287 200.869,212.287 R7.1@201.129,212.547 201.701,211.975 201.701,210.769 201.016,210.083 R8.2@199.556,210.083
NetR8_1: R8.1 U1.5 | length 2.2
  Component Side w0.508: U1.5@196.148,210.687 197.249,210.687 197.853,210.083 R8.1@198.056,210.083
NetR9_2: R9.2 R10.1 U1.4 | length 3.3
  Component Side w0.508: U1.4@196.148,209.887 196.881,209.887 197.814,208.954 R10.1@198.12,208.954 R9.2@199.109,208.954